# EAGLE board Arduino Uno RN2483 Shield V2 (EAGLE 7.4.0)
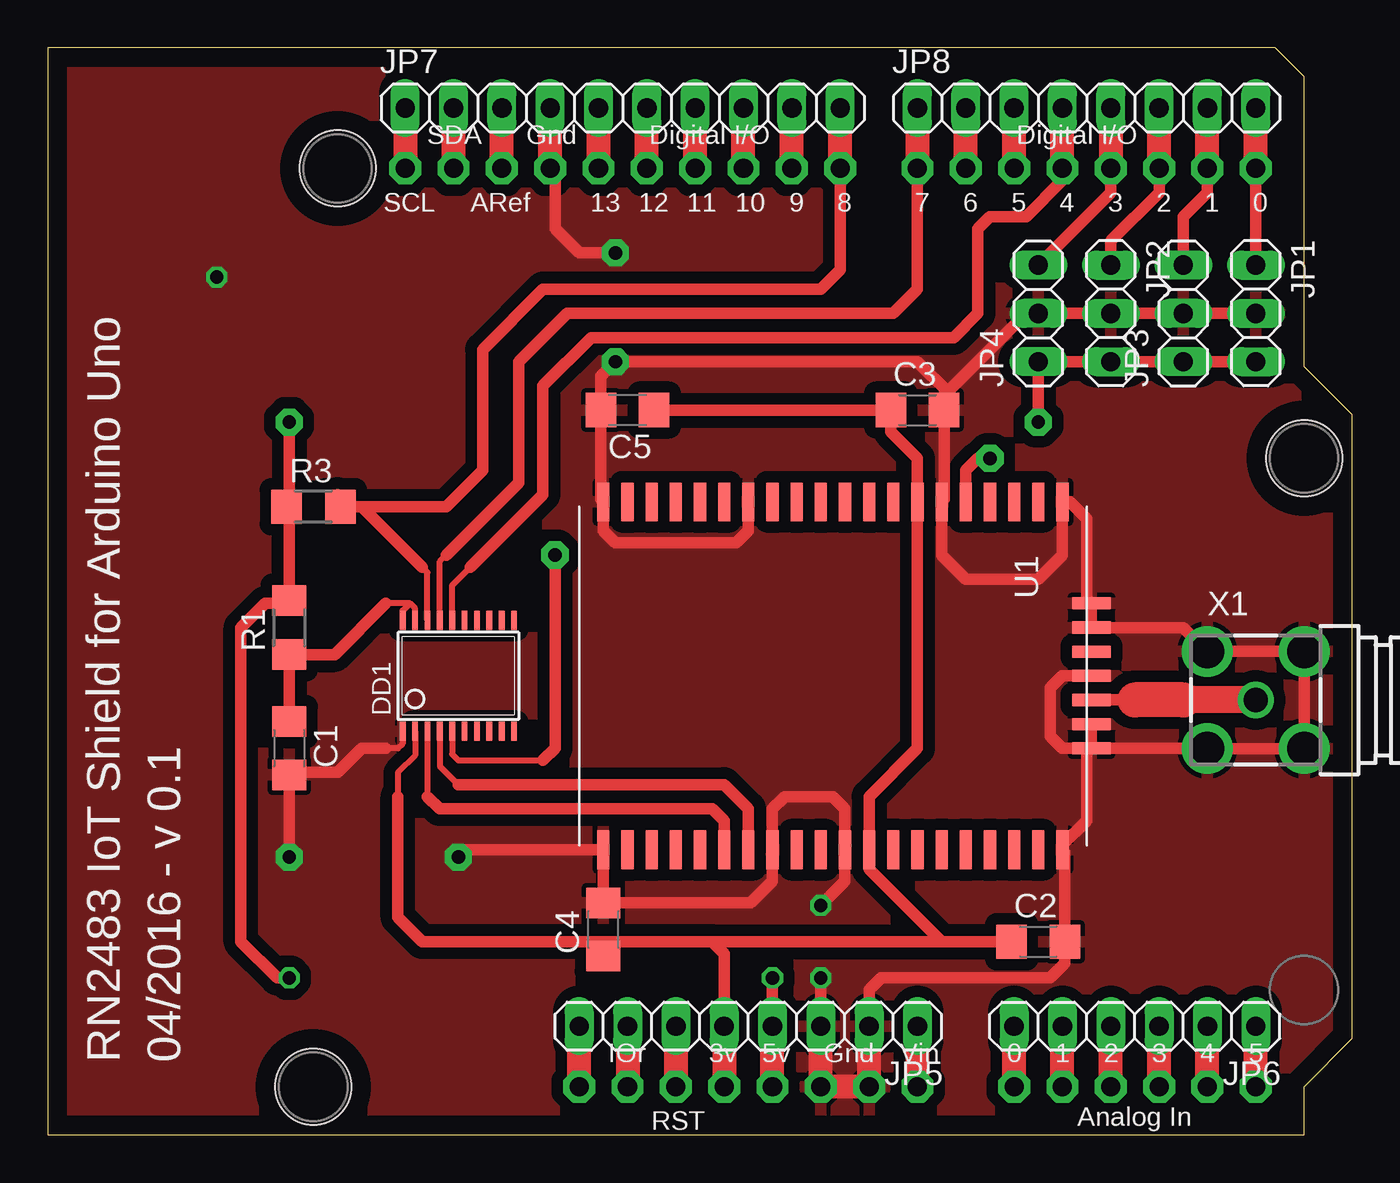
[diagram p0: board, top side]
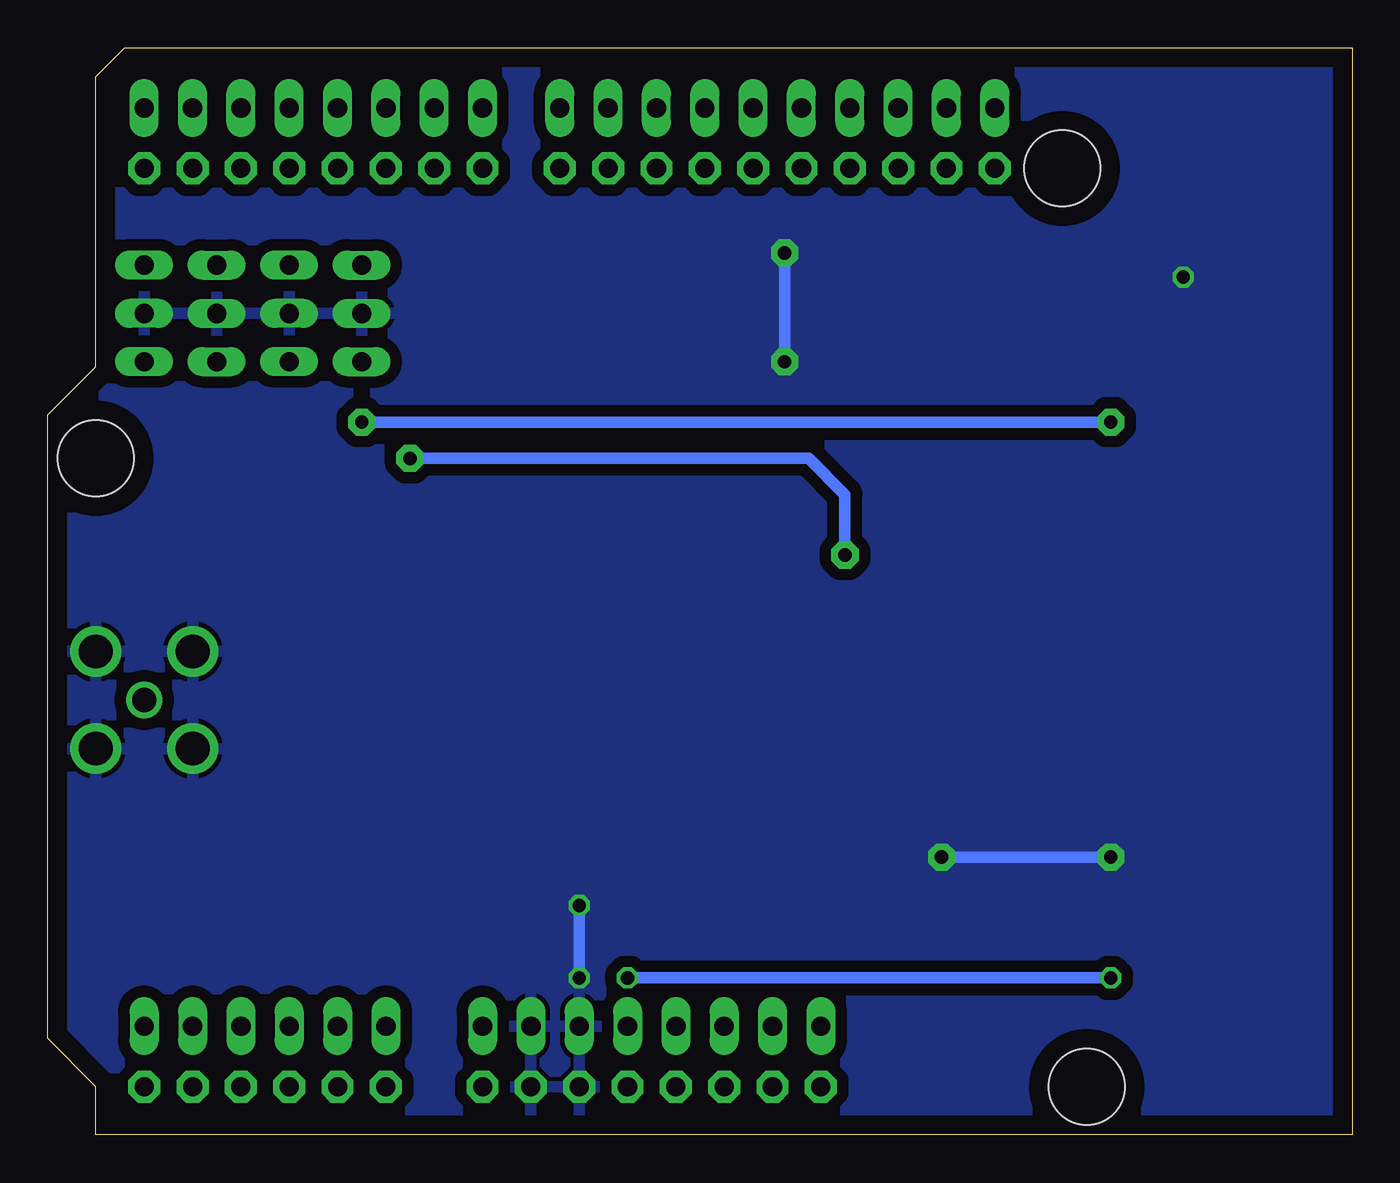
[diagram p1: board, bottom side, seen from below]

Size 68.58 x 57.15 mm. Coordinates in mm from the lower left corner, seen from the top.
Copper layers (1*16): Top 0.035mm / dielectric 1.5mm / Bottom 0.035mm
Design rules "default": minimum track width 10mil, minimum drill 24mil, track to track 8mil, track to pad 8mil, pad to pad 8mil, via to via 8mil, smd to smd 8mil, copper to edge 40mil, drill to drill 8mil, minimum pad ring 10mil, minimum via ring 8mil, stop-mask expansion 4mil, vias tented up to drill 0mil, thermal gap 10mil
Holes 4 mm at 15.24,50.8 66.04,35.56 13.97,2.54

## Footprints (pad centres in the part's own frame; a part is rotated, then mirrored left to right if it is on the bottom)
C1206 = smd 1.6 x 1.8: 1 -1.4,0; 2 1.4,0
TSSOP20 = smd 0.305 x 0.991: 1 -2.925,-2.918; 2 -2.275,-2.918; 3 -1.625,-2.918; 4 -0.975,-2.918; 5 -0.325,-2.918; 6 0.325,-2.918; 7 0.975,-2.918; 8 1.625,-2.918; 9 2.275,-2.918; 10 2.925,-2.918; 11 2.925,2.918; 12 2.275,2.918; 13 1.625,2.918; 14 0.975,2.918; 15 0.325,2.918; 16 -0.325,2.918; 17 -0.975,2.918; 18 -1.625,2.918; 19 -2.275,2.918; 20 -2.925,2.918
1X03 = drill 1.016 long: 1 -2.54,0; 2 0,0; 3 2.54,0
1X08 = drill 1.016 long: 1 -8.89,0; 2 -6.35,0; 3 -3.81,0; 4 -1.27,0; 5 1.27,0; 6 3.81,0; 7 6.35,0; 8 8.89,0
1X06 = drill 1.016 long: 1 -6.35,0; 2 -3.81,0; 3 -1.27,0; 4 1.27,0; 5 3.81,0; 6 6.35,0
1X10 = drill 1.016 long: 1 -11.43,0; 2 -8.89,0; 3 -6.35,0; 4 -3.81,0; 5 -1.27,0; 6 1.27,0; 7 3.81,0; 8 6.35,0; 9 8.89,0; 10 11.43,0
R1206 = smd 1.6 x 1.803: 1 -1.422,0; 2 1.422,0
RN2483 = smd 2.032 x 0.635: 1_GND 18.034,1.27; 2_UART_RTS 18.034,2.54; 3_UART_CTS 18.034,3.81; 4_RESERVED 18.034,5.08; 5_RESERVED 18.034,6.35; 6_UART_TX 18.034,7.62; 7_UART_RX 18.034,8.89; 8_GND 18.034,10.16; 9_GPIO13 18.034,11.43; 10_GPIO12 18.034,12.7; 11_GND 18.034,13.97; 12_VDD 18.034,15.24; 13_GPIO11 18.034,16.51; 14_GPIO10 18.034,17.78; 15_NC 18.034,19.05; 16_NC 18.034,20.32; 17_NC 18.034,21.59; 18_NC 18.034,22.86; 19_NC 18.034,24.13; 20_GND 18.034,25.4; 28_GND -0.254,25.4; 29_NC -0.254,24.13; 30_TEST0 -0.254,22.86; 31_TEST1 -0.254,21.59; 32_REST -0.254,20.32; 33_GND -0.254,19.05; 34_VDD -0.254,17.78; 35_GPIO0 -0.254,16.51; 36_GPIO1 -0.254,15.24; 37_GPIO2 -0.254,13.97; 38_GPIO3 -0.254,12.7; 39_GPIO4 -0.254,11.43; 40_GPIO5 -0.254,10.16; 41_GND -0.254,8.89; 42_NC -0.254,7.62; 43_GPIO6 -0.254,6.35; 44_GPIO7 -0.254,5.08; 45_GPIO8 -0.254,3.81; 46_GPIO9 -0.254,2.54; 47_GND -0.254,1.27 | smd 0.635 x 2.032: 21_GND 12.7,26.924; 22_GND 11.43,26.924; 23_RFH 10.16,26.924; 24_GND 8.89,26.924; 25_RFL 7.62,26.924; 26_GND 6.35,26.924; 27_GND 5.08,26.924
ARDUINOR3 = drill 1 pad 1.676 octagon: 3V 35.56,2.54; 5V 38.1,2.54; A0 50.8,2.54; A1 53.34,2.54; A2 55.88,2.54; A3 58.42,2.54; A4 60.96,2.54; A5 63.5,2.54; AREF 23.876,50.8; D0 63.5,50.8; D1 60.96,50.8; D2 58.42,50.8; D3 55.88,50.8; D4 53.34,50.8; D5 50.8,50.8; D6 48.26,50.8; D7 45.72,50.8; D8 41.656,50.8; D9 39.116,50.8; D10 36.576,50.8; D11 34.036,50.8; D12 31.496,50.8; D13 28.956,50.8; GND 26.416,50.8; GND1 43.18,2.54; GND2 40.64,2.54; IOREF 30.48,2.54; RESERVED 27.94,2.54; RESET 33.02,2.54; SCL 18.796,50.8; SDA 21.336,50.8; VIN 45.72,2.54
BU-SMA-G = drill 1.27: 1 0,0 | drill 1.778: 2 -2.55,2.55; 3 2.55,2.55; 4 2.55,-2.55; 5 -2.55,-2.55

## Placement (x,y rotation side)
C1  [C1206]  12.7,20.32 270 top
C2  [C1206]  52.07,10.16 0 top
C3  [C1206]  45.72,38.1 0 top
C4  [C1206]  29.21,10.79 90 top
C5  [C1206]  30.48,38.1 180 top
DD1  GTL2003PW  [TSSOP20]  21.59,24.13 0 top
JP1  [1X03]  63.5,43.18 270 top
JP2  [1X03]  55.88,43.18 270 top
JP3  [1X03]  59.69,43.18 90 top
JP4  [1X03]  52.07,43.18 90 top
JP5  [1X08]  36.83,5.71 180 top
JP6  [1X06]  57.15,5.71 180 top
JP7  [1X10]  30.23,53.98 0 top
JP8  [1X08]  54.61,53.98 0 top
R1  [R1206]  12.7,26.67 90 top
R3  [R1206]  13.97,33.02 0 top
U1  RN2483  [RN2483]  27.94,33.02 270 top
U2  ARDUINOR3-DIMENSION  [ARDUINOR3]  0,0 0 top
X1  BU-SMA-G  [BU-SMA-G]  63.5,22.86 0 top

## Library data of the parts
C1-C5 R1 R3 = rcl
DD1 = gtl2003
JP1-JP8 = pinhead
U1 = med-it2
U2 = med-it
X1 = con-coax; OC_FARNELL: unknown; OC_NEWARK: unknown

## Nets
+3V3: C2.1 C3.1 C4.1 C5.1 DD1.2 JP5.5 U1.12_VDD U1.34_VDD U2.3V
+5V: JP1.3 JP2.3 JP3.1 JP4.1 JP5.4 R1.2 R3.1 U2.5V
D0: JP1.1 JP8.8 U2.D0
D1: JP3.3 JP8.7 U2.D1
D2: JP2.1 JP8.6 U2.D2
D3: JP4.3 JP8.5 U2.D3
D4: DD1.16 JP8.4 U2.D4
D7: DD1.17 JP8.1 U2.D7
D8: DD1.18 JP7.10 R3.2 U2.D8
GND: C1.2 C2.2 C3.2 C4.2 C5.2 DD1.1 JP1.2 JP2.2 JP3.2 JP4.2 JP5.2 JP5.3 U1.1_GND U1.8_GND U1.11_GND U1.20_GND U1.21_GND U1.22_GND U1.24_GND U1.26_GND U1.27_GND U1.28_GND U1.33_GND U1.41_GND U1.47_GND U2.GND1 U2.GND2 X1.2 X1.3 X1.4 X1.5
N$1: U1.23_RFH X1.1
N$2: C1.1 DD1.19 DD1.20 R1.1
N$3: DD1.3 U1.6_UART_TX
N$4: JP7.9 U2.D9
N$5: JP7.8 U2.D10
N$6: DD1.4 U1.7_UART_RX
N$7: DD1.5 U1.32_REST
N$8: JP7.7 U2.D11
N$9: JP5.1 U2.VIN
N$10: JP7.6 U2.D12
N$11: JP7.5 U2.D13
N$12: JP7.4 U2.GND
N$13: JP7.3 U2.AREF
N$14: JP5.6 U2.RESET
N$15: JP5.7 U2.IOREF
N$16: JP5.8 U2.RESERVED
N$17: JP6.6 U2.A0
N$18: JP6.5 U2.A1
N$19: JP6.4 U2.A2
N$20: JP6.3 U2.A3
N$21: JP6.2 U2.A4
N$22: JP6.1 U2.A5
N$23: JP7.2 U2.SDA
N$24: JP7.1 U2.SCL
N$26: JP8.3 U2.D5
N$27: JP8.2 U2.D6

## Tracks (layer width: path | path; a pad name or v marks a point on that pad's centre or on a via)
+3V3
  Top 0.305: DD1.2 19.32,19.95 18.41,19.05 18.41,17.78
  Top 0.61: C5.1 C3.1 44.32,36.96 45.72,35.56 U1.34_VDD 45.72,20.32 43.18,17.78 U1.12_VDD 43.18,13.97 46.99,10.16 C2.1 34.92,10.16 | JP5.5 35.56,9.53 34.92,10.16 | 34.92,10.16 29.98,10.16 | 29.98,10.16 C4.1 | 29.98,10.16 19.68,10.16 18.41,11.43 18.41,17.78
  Top 1.27: JP5.5 U2.3V
+5V  (via drill 0.7 pad 0.41, 0.7 pad 1.42)
  Top 0.61: JP1.3 JP3.1 JP2.3 JP4.1 v52.07,37.47 | v12.7,37.47 12.7,33.17 R3.1 12.7,32.87 R1.2 12.55,27.94 11.43,27.94 10.16,26.67 10.16,10.16 12.06,8.26 v12.7,8.26 | JP5.4 v38.1,8.26
  Top 1.27: U2.5V JP5.4
  Bottom 0.61: v52.07,37.47 v12.7,37.47 | v38.1,8.26 v12.7,8.26
D0
  Top 0.61: U2.D0 JP1.1
  Top 1.27: U2.D0 JP8.8
D1
  Top 0.61: JP3.3 59.69,48.26 60.96,49.53 U2.D1
  Top 1.27: U2.D1 JP8.7
D2
  Top 0.61: JP2.1 55.88,46.99 58.42,49.53 U2.D2
  Top 1.27: U2.D2 JP8.6
D3
  Top 0.61: JP4.3 55.88,49.53 U2.D3
  Top 1.27: JP8.5 U2.D3
D4
  Top 0.305: DD1.16 21.27,28.89 22.23,29.84
  Top 0.61: 22.23,29.84 26.04,33.66 26.04,39.37 28.57,41.91 47.62,41.91 48.9,43.18 48.9,47.62 49.53,48.26 51.44,48.26 53.34,50.16 U2.D4
  Top 1.27: U2.D4 JP8.4
D7
  Top 0.305: DD1.17 20.61,30.14 20.95,30.48
  Top 0.61: 20.95,30.48 24.77,34.29 24.77,40.64 27.3,43.18 44.45,43.18 45.72,44.45 U2.D7
  Top 1.27: JP8.1 U2.D7
D8
  Top 0.305: DD1.18 19.96,29.57 19.37,30.16
  Top 0.61: 19.68,29.84 19.37,30.16 16.51,33.02 | 16.51,33.02 15.88,33.02 R3.2 15.24,33.17 15.24,33.66 | U2.D8 41.66,45.47 40.64,44.45 26.04,44.45 22.86,41.27 22.86,34.92 20.95,33.02 16.51,33.02
  Top 1.27: U2.D8 JP7.10
GND  (via drill 0.7 pad 0.41, 0.7 pad 1.42)
  Top 0.305: DD1.1 18.66,20.57 18.41,20.32 17.78,20.32
  Top 0.61: JP1.2 JP3.2 JP2.2 JP4.2 51.44,43.18 47.31,39.05 | U1.21_GND X1.5 X1.4 X1.3 66.03,25.41 X1.2 59.69,26.67 U1.26_GND U1.27_GND 54.61,28.19 54.61,32.38 53.72,33.27 U1.28_GND 53.34,30.48 52.07,29.21 48.26,29.21 46.99,30.48 U1.33_GND 47.12,33.4 C3.2 46.99,38.23 46.99,38.73 47.31,39.05 | U1.21_GND 54.61,20.07 54.61,16.51 53.34,15.24 U1.20_GND 53.47,14.86 C2.2 53.47,9.02 52.7,8.26 43.81,8.26 43.18,7.62 JP5.2 | v29.84,46.35 27.94,46.35 26.67,47.62 26.67,50.55 | v21.59,14.61 21.97,14.99 U1.1_GND C4.2 36.96,12.2 38.1,13.34 U1.8_GND 38.1,17.14 38.73,17.78 41.27,17.78 41.91,17.14 U1.11_GND 41.91,13.34 v40.64,12.06 | 17.78,20.32 16.51,20.32 15.24,19.05 12.83,19.05 C1.2 v12.7,14.61 | v40.64,8.26 JP5.3 | 47.31,39.05 45.72,40.64 v29.84,40.64 29.08,39.88 C5.2 29.08,33.4 U1.47_GND 29.21,31.75 29.84,31.11 36.2,31.11 36.83,31.75 U1.41_GND | U1.21_GND U1.22_GND | U1.24_GND 53.34,24.13 52.7,23.5 52.7,20.95 53.34,20.32 U1.21_GND
  Top 1.27: JP5.3 U2.GND2 U2.GND1 JP5.2
  Bottom 0.61: v29.84,40.64 v29.84,46.35 | v21.59,14.61 v12.7,14.61 | v40.64,12.06 v40.64,8.26
  other vias: 8.89,45.09
  pour Top (isolate 0.61): 0,57.15 0,0 66.04,0 66.04,2.54 68.58,5.08 68.58,37.47 66.04,40.01 66.04,55.88 64.77,57.15
  pour Bottom (isolate 0.61): 0,57.15 0,0 66.04,0 66.04,2.54 68.58,5.08 68.58,37.47 66.04,40.01 66.04,55.88 64.77,57.15
N$1
  Top 0.61: 57.15,22.86 U1.23_RFH
  Top 1.422: X1.1 59.69,22.86
  Top 1.85: 59.69,22.86 57.15,22.86
N$2
  Top 0.305: 19.05,27.94 18.66,27.55 DD1.20 | DD1.19 19.32,27.68 19.05,27.94 | 19.05,27.94 17.78,27.94
  Top 0.61: C1.1 R1.1 15.09,25.25 17.78,27.94
N$3
  Top 0.305: DD1.3 19.96,17.78
  Top 0.61: U1.6_UART_TX 35.56,16.51 34.92,17.14 20.6,17.14 19.96,17.78
N$4
  Top 1.27: U2.D9 JP7.9
N$5
  Top 1.27: U2.D10 JP7.8
N$6
  Top 0.305: DD1.4 20.61,19.39 21.59,18.41
  Top 0.61: 21.59,18.41 35.56,18.41 36.83,17.14 U1.7_UART_RX
N$7  (via drill 0.7 pad 1.42)
  Top 0.305: DD1.5 21.27,20.01 21.59,19.68 26.04,19.68
  Top 0.61: 26.04,19.68 26.67,20.32 v26.67,30.48 | v49.53,35.56 48.9,35.56 48.26,34.92 U1.32_REST
  Bottom 0.61: v26.67,30.48 26.67,33.66 28.57,35.56 v49.53,35.56
N$8
  Top 1.27: U2.D11 JP7.7
N$9
  Top 1.27: JP5.1 U2.VIN
N$10
  Top 1.27: U2.D12 JP7.6
N$11
  Top 1.27: U2.D13 JP7.5
N$12
  Top 1.27: U2.GND JP7.4
N$13
  Top 1.27: U2.AREF JP7.3
N$14
  Top 1.27: JP5.6 U2.RESET
N$15
  Top 1.27: JP5.7 U2.IOREF
N$16
  Top 1.27: U2.RESERVED JP5.8
N$17
  Top 1.27: U2.A0 JP6.6
N$18
  Top 1.27: U2.A1 JP6.5
N$19
  Top 1.27: U2.A2 JP6.4
N$20
  Top 1.27: U2.A3 JP6.3
N$21
  Top 1.27: U2.A4 JP6.2
N$22
  Top 1.27: U2.A5 JP6.1
N$23
  Top 1.27: U2.SDA JP7.2
N$24
  Top 1.27: JP7.1 U2.SCL
N$26
  Top 1.27: U2.D5 JP8.3
N$27
  Top 1.27: U2.D6 JP8.2

## Text on the board
tNames: RN2483 IoT Shield for Arduino Uno | 04/2016 - v 0.1